# Altium PCB ESC_PCB.PcbDoc
Units mm, origin at the board's own origin, x right, y up, seen from the top; angles counter-clockwise.
Board outline 77.09 x 32.51 mm, 4 copper layers (Top signal, GND, VBAT, Bottom Signal), stack 0.603 mm thick; 61 components, 47 nets, 212 pads, 224 vias.
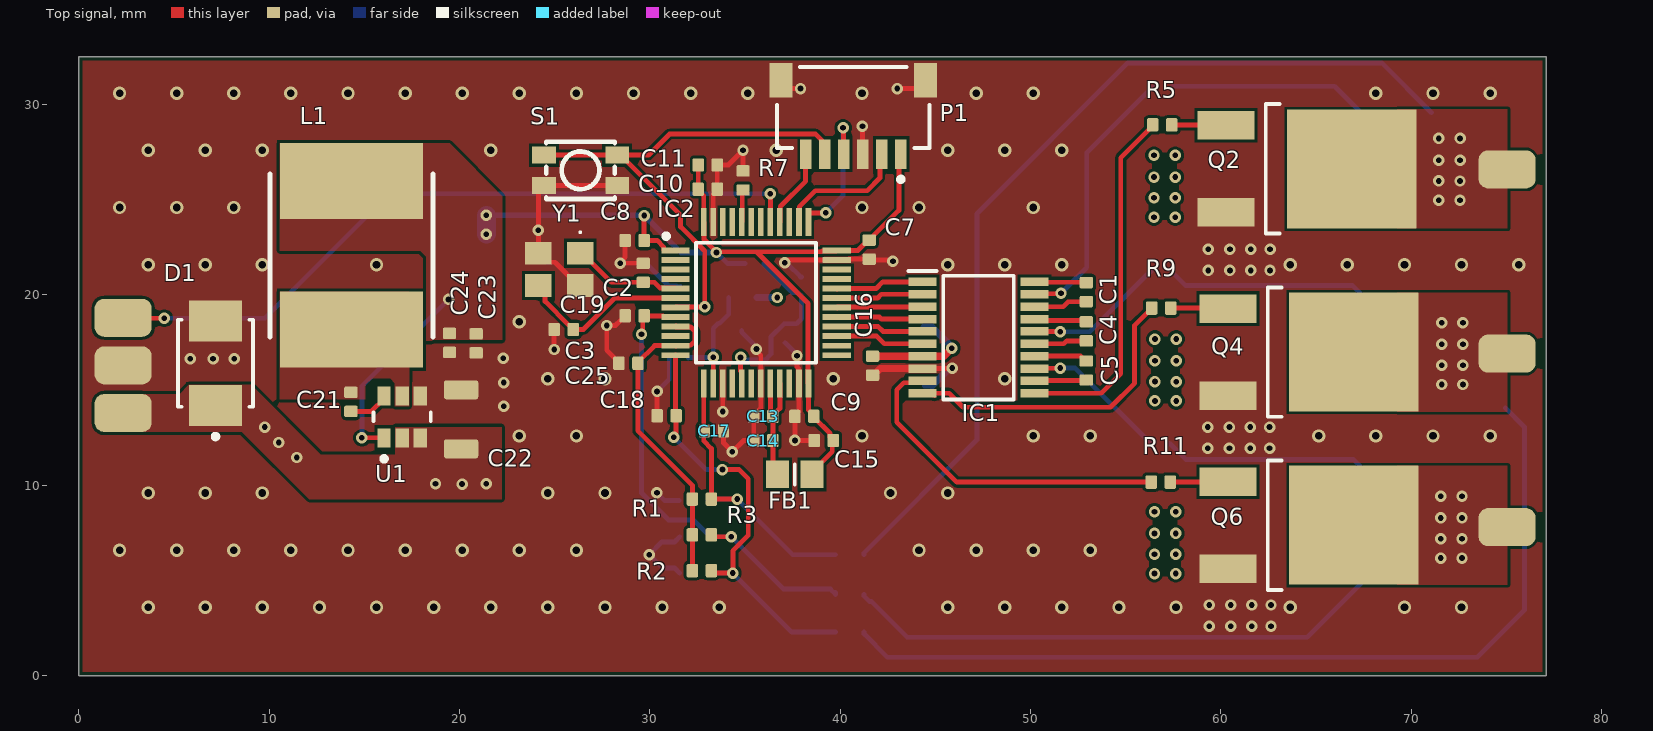
[diagram p0: Top signal view]
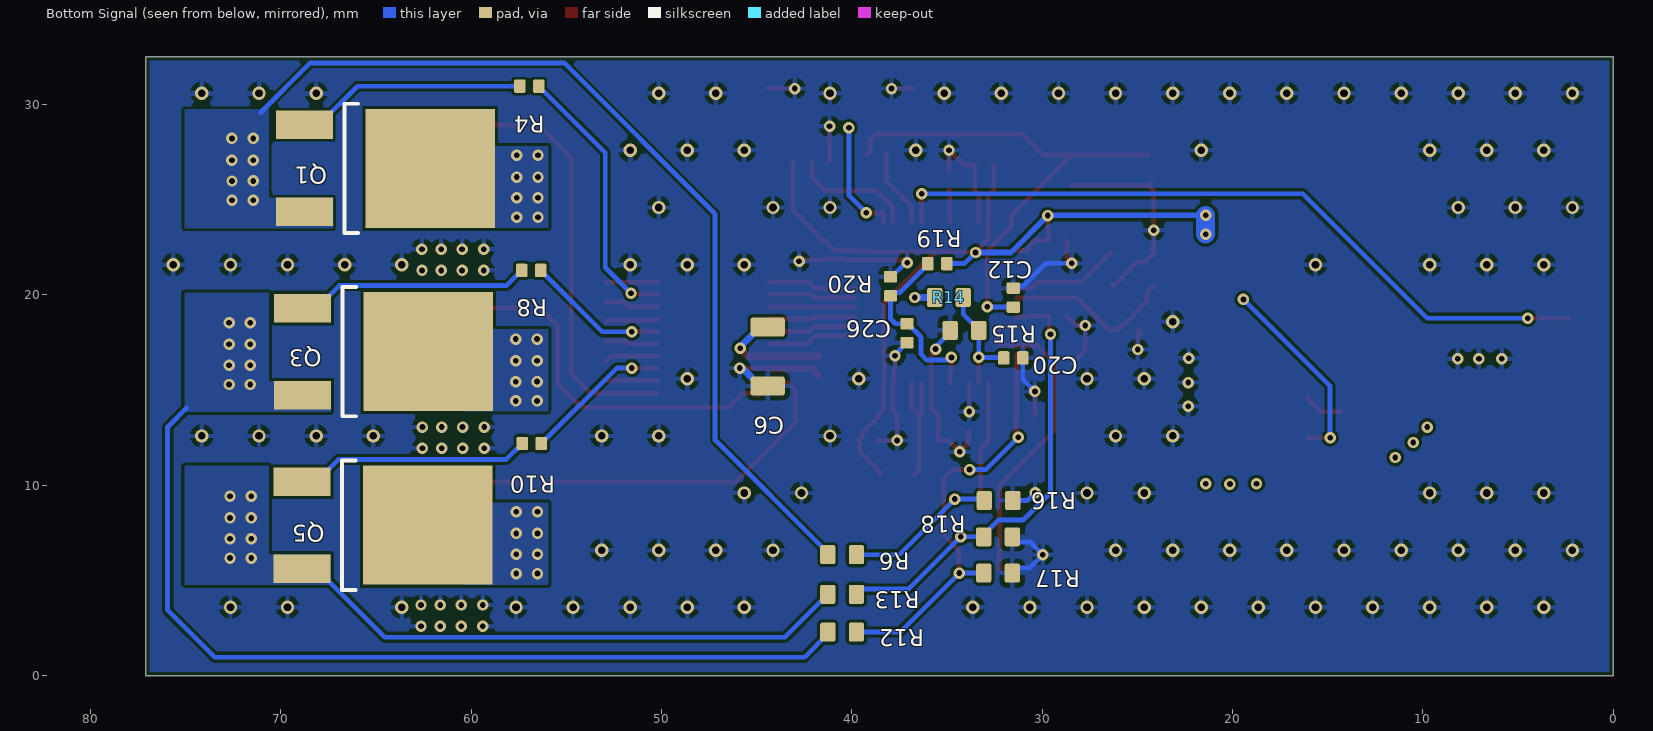
[diagram p1: Bottom Signal view, seen from below]
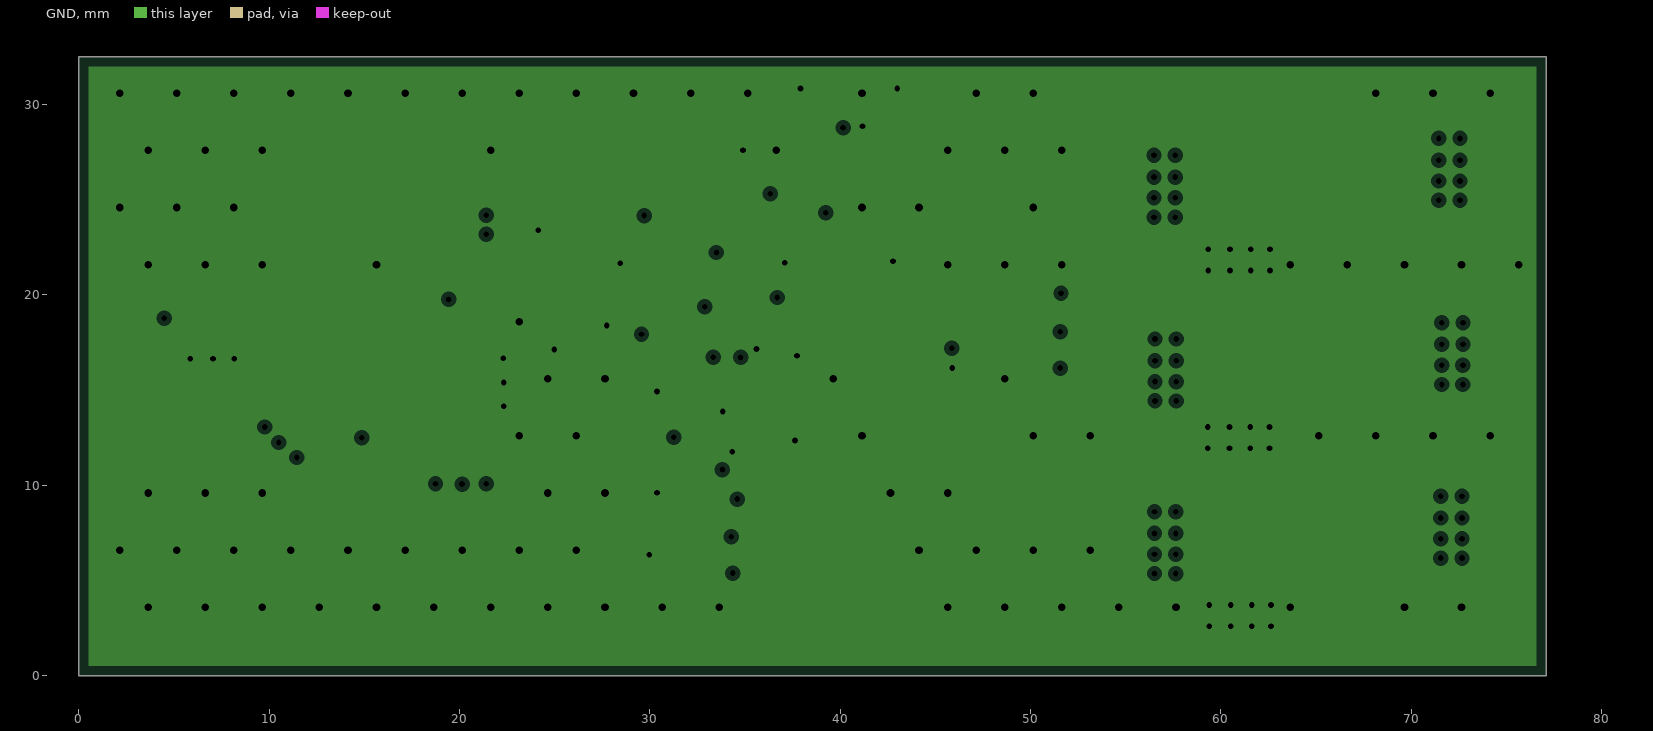
[diagram p2: GND, clearances drawn from the general rule]
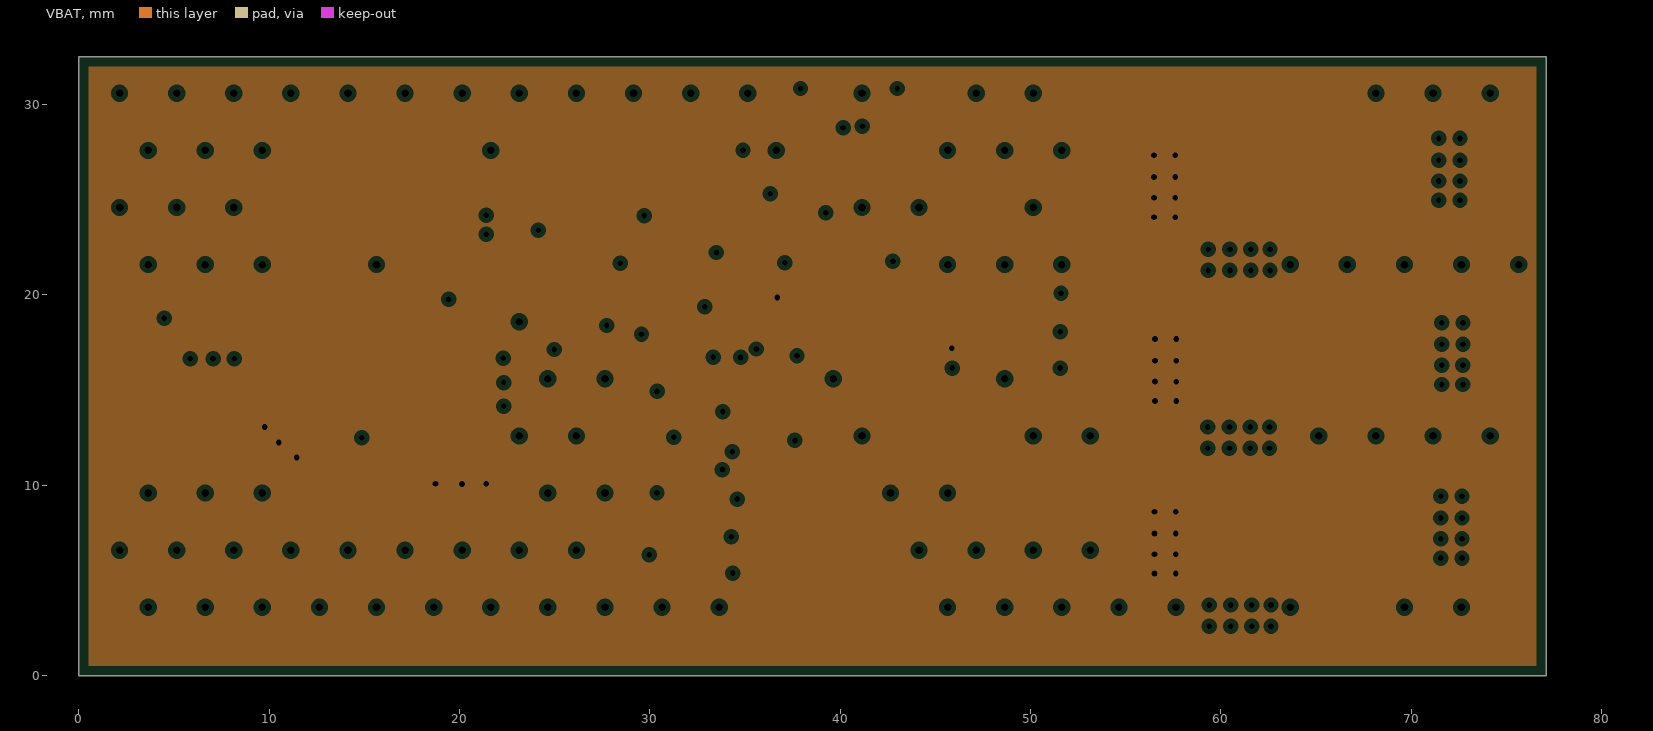
[diagram p3: VBAT, clearances drawn from the general rule]
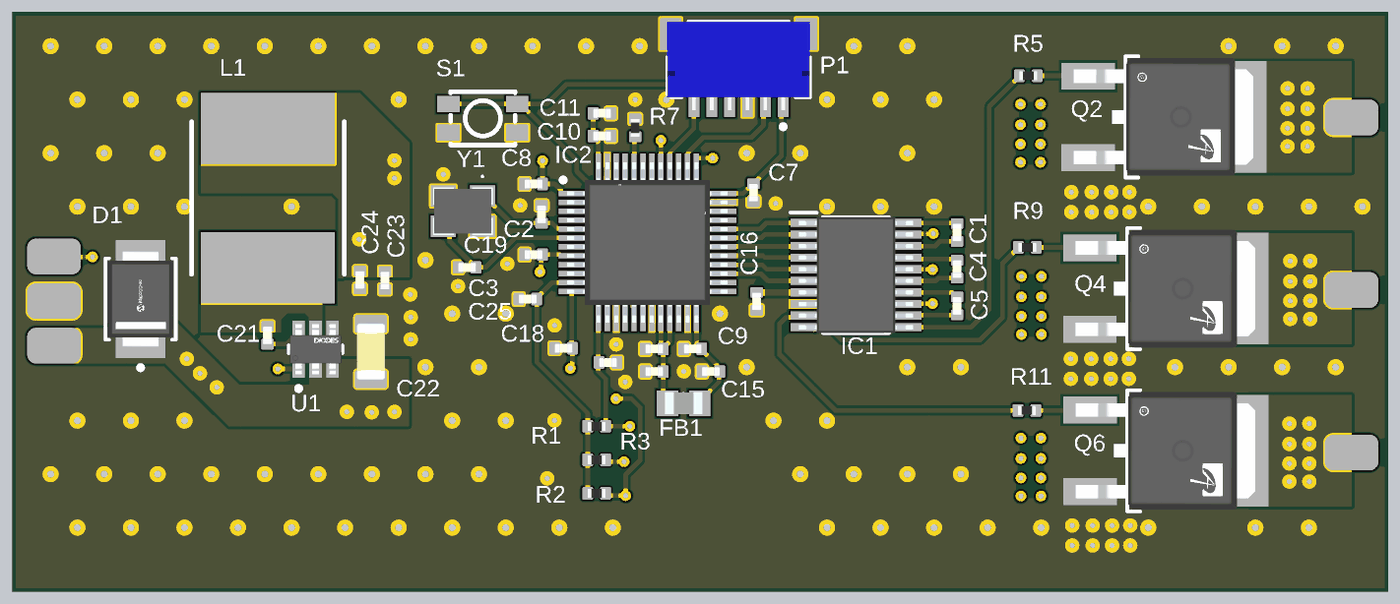
[diagram p4: 3D render of the assembled board from above, using the file's embedded part models]
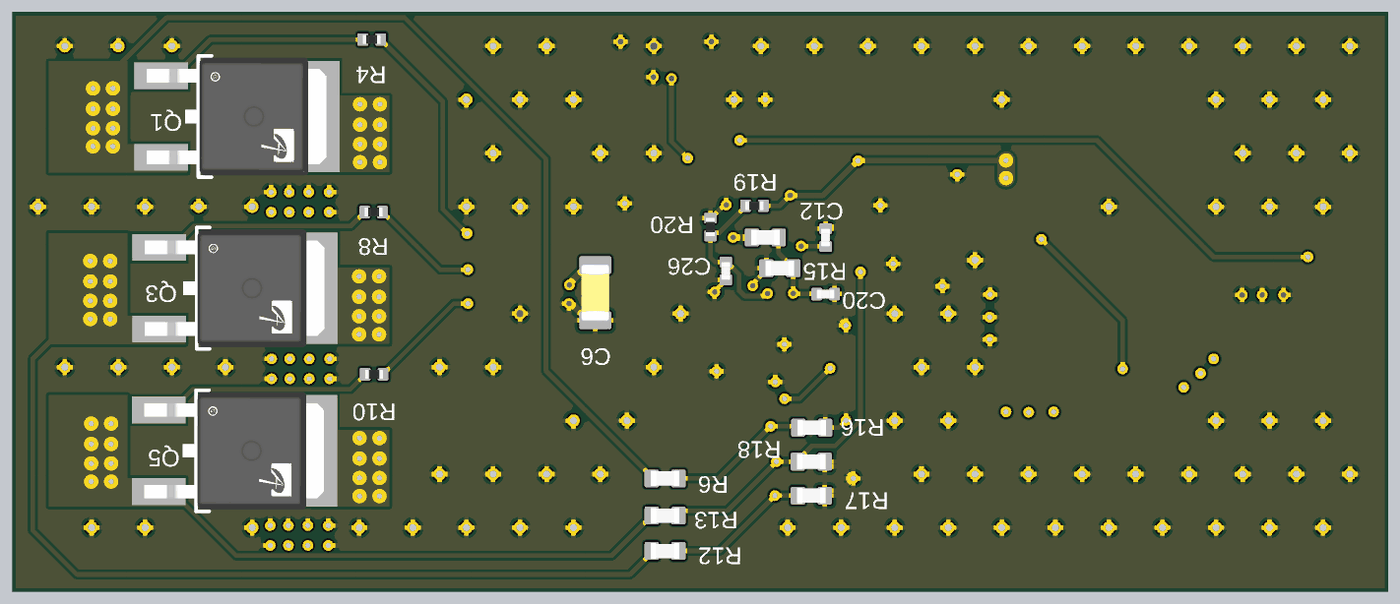
[diagram p5: 3D render of the assembled board from below, using the file's embedded part models]

## Layer stack, top to bottom
Top Solder: solder mask 0.0102, Solder Resist, Dk 3.5
Top signal: signal copper 0.035
Dielectric 2: prepreg 0.0711, PP-006, Dk 4.1
GND: plane copper 0.0356, net GND
Dielectric 1: dielectric 0.32, FR-4, Dk 4.8
VBAT: plane copper 0.0356, net VBAT
Dielectric 3: prepreg 0.0711, PP-006, Dk 4.1
Bottom Signal: signal copper 0.035
Bottom Solder: solder mask 0.0102, Solder Resist, Dk 3.5

## Board outline
0,0 0,32.512 77.089,32.512 77.089,0

## Design rules (kind name [scope] priority, off if disabled: settings)
BoardOutlineClearance [All] p1: gap=0.2 ignorepadtopadclearanceinfootprint=FALSE
Clearance [All] p1: gap=0.15 ignorepadtopadclearanceinfootprint=TRUE
Clearance Clearance_Layer [OnLayer('GND') Or OnLayer('5V')] p2: gap=0.254 ignorepadtopadclearanceinfootprint=TRUE
ComponentClearance [All] p1: gap=0.254 collisioncheckmode=3 verticalgap=2540 showdistances=FALSE
HoleSize [All] p1: absolutevalues=TRUE maxlimit=6.3 minlimit=0.15 maxpercent=80.000 minpercent=20.000
HoleToHoleClearance PAD-HoleToHoleClearance [IsPad] p1: gap=0.45 allowstackedmicrovias=FALSE
HoleToHoleClearance Via-HoleToHoleClearance [IsVia] p2: gap=0.2 allowstackedmicrovias=FALSE
MinimumAnnularRing [All] p1: minimumring=0.15
MinimumAnnularRing VIA-MinimumAnnularRing [IsVia] p2: minimumring=0.5
MinimumAnnularRing PAD-MinimumAnnularRing [IsPad] p3: minimumring=0.2
MinimumSolderMaskSliver [All] p1: minsoldermaskwidth=0.1
PlaneClearance [All] p1: clearance=0.254
PlaneConnect [All] p1: planeconnectstyle=Direct reliefexpansion=0.508 reliefentries=4 reliefconductorwidth=0.381 reliefairgap=0.254
PolygonConnect GND_ALL [All vs IsNamedPolygon('GND_ALL_BOT')  Or  IsNamedPolygon('GND_ALL_BOT')] p1: connectstyle=Relief reliefconductorwidth=0.254 reliefentries=4 polygonreliefangle="90 Angle" airgapwidth=0.254
PolygonConnect [All] p2: connectstyle=Direct reliefconductorwidth=0.381 reliefentries=4 polygonreliefangle="90 Angle" airgapwidth=0.254
RoutingCorners [All] p1: cornerstyle=45-Degree minsetback=0.381 maxsetback=0.381
RoutingVias [All] p1: holewidth=0.3 width=0.6 viastyle="Through Hole" minholewidth=0.2 minwidth=0.3 maxholewidth=6.3 maxwidth=6.5
SilkToSilkClearance [All] p1: silktosilkclearance=0.15
SilkToSolderMaskClearance [IsPad] p1: minsilkscreentomaskgap=0.1 clearancetoexposedcopper=TRUE
SolderMaskExpansion [All] p1: expansion=0.102 istentingtop=FALSE
SupplyNets "Schematic Supply Nets_3" [InNet('3V3')] p1: voltage=0.000
SupplyNets "Schematic Supply Nets_2" [InNet('3V3A')] p2: voltage=0.000
SupplyNets "Schematic Supply Nets_1" [InNet('VBAT')] p3: voltage=0.000
SupplyNets "Schematic Supply Nets" [InNet('GND')] p4: voltage=0.000
Width VBAT [InNet('VBAT')] p1: maxlimit=10 minlimit=0.254 preferedwidth=0.381 minimp=50.000000 maximp=50.000000 favimp=50.000000
Width [All] p2: maxlimit=10 minlimit=0.254 preferedwidth=0.254 toplayer_maxwidth=10 minimp=50.000000 maximp=50.000000 favimp=50.000000
21 further rules are at their usual default settings.

## Components (designator, comment, footprint, x,y, rotation, side; value= is the part's Value field where it differs from the comment)
C1 "100nF" CAP_0402 52.934,20.142 r90 top
C2 "12pF" CAP_0402 29.655,21.158 r90 top locked
C3 "12pF" CAP_0402 25.476,18.18 r180 top locked
C4 "100nF" CAP_0402 52.934,18.085 r90 top
C5 "100nF" CAP_0402 52.934,16.027 r90 top
C6 "10uF" CAP_1206 44.425,16.763 r90 bottom
C7 "100nF" CAP_0402 41.529,22.377 r270 top locked
C8 "100nF" CAP_0402 29.205,22.86 r180 top locked
C9 "100nF" CAP_0402 38.125,13.614 r180 top locked
C10 "100nF" CAP_0402 33.045,25.552 r0 top locked
C11 "4.7uF" CAP_0402 33.045,26.822 r0 top locked
C12 "100nF" CAP_0402 31.521,19.855 r90 bottom
C13 "100nF" CAP_0402 35.966,13.614 r180 top locked
C14 "1uF" CAP_0402 35.966,12.344 r0 top locked
C15 "100nF" CAP_0402 39.141,12.344 r180 top locked
C16 "100nF" CAP_0402 41.707,16.281 r90 top
C17 "1nF" CAP_0402 33.376,12.852 r180 top
C18 "1nF" CAP_0402 30.886,13.653 r0 top
C19 "1nF" CAP_0402 29.205,18.898 r0 top
C20 "1nF" CAP_0402 31.521,16.688 r180 bottom
C21 "100nF" CAP_0402 14.3,14.376 r270 top locked
C22 "10uF" CAP_1206 20.091,13.462 r270 top locked
C23 "22uF" CAP_0402 20.879,17.45 r90 top locked
C24 "22uF" CAP_0402 19.482,17.475 r90 top locked
C25 "1nF" CAP_0402 28.88,16.408 r0 top
C26 "100nF" CAP_0402 37.109,17.983 r90 bottom
D1 "SMBJ16A" FP-DO-214AA-MFG 7.188,16.408 r90 top
FB1 "MPZ2012S601ATD25" BEADC2112X105N 37.617,10.566 r0 top locked
IC1 "DRV8300DPWR" SOP65P640X120-20N 47.269,17.755 r0 top
IC2 "STM32G431CBT6" QFP50P900X900X160-48N 35.585,19.583 r0 top locked
L1 "4.7uH Inductor" "SMD 8x8 Inductor" 14.326,22.073 r90 top locked
P1 "SM06B-SRSS-TB(LF)(SN)" JST-SM06B-SRSS-TB_V 40.691,29.845 r180 top
Q1 "AOD4184A" FP-TO252-MFG 63.551,26.645 r270 bottom
Q2 "AOD4184A" FP-TO252-MFG 65.477,26.619 r270 top
Q3 "AOD4184A" FP-TO252-MFG 63.657,17.018 r270 bottom
Q4 "AOD4184A" FP-TO252-MFG 65.578,16.993 r270 top
Q5 "AOD4184A" FP-TO252-MFG 63.682,7.899 r270 bottom
Q6 "AOD4184A" FP-TO252-MFG 65.582,7.899 r270 top
R1 "10k" RES_0402 32.741,9.271 r0 top
R2 "10k" RES_0402 32.741,5.512 r0 top
R3 "10k" RES_0402 32.741,7.391 r0 top
R4 "10R" RES_0402 56.947,30.963 r0 bottom
R5 "10R" RES_0402 56.921,28.931 r0 top
R6 "100k" RES_0603 40.513,6.35 r0 bottom
R7 "10k" RES_0402 34.9,26.01 r90 top
R8 "10R" RES_0402 56.845,21.285 r0 bottom
R9 "10R" RES_0402 56.871,19.304 r0 top
R10 "10R" RES_0402 56.82,12.192 r0 bottom
R11 "10R" RES_0402 56.845,10.16 r0 top
R12 "100k" RES_0603 40.513,2.286 r0 bottom
R13 "100k" RES_0603 40.513,4.267 r0 bottom
R14 "100k" RES_0603 34.9,19.863 r0 bottom
R15 "10k" RES_0603 34.087,18.136 r180 bottom
R16 "18k" RES_0603 32.297,9.195 r0 bottom
R17 "18k" RES_0603 32.322,5.385 r0 bottom
R18 "18k" RES_0603 32.322,7.29 r0 bottom
R19 "10k" RES_0402 35.509,21.641 r180 bottom
R20 "10k" RES_0402 37.973,20.447 r270 bottom
S1 "C4B1802110" SW-SMD_4P-L3.5-W3.0-P1.50-LS4.7 26.365,26.543 r0 top
U1 "AP63203WU-7" FP-TSOT26-MFG 16.993,13.589 r90 top locked
Y1 "X32258MOB4SI" X32258MOB4SI 25.249,21.336 r180 top locked

## Footprints (in the part's own frame and the unit in brackets; to place one, negate y for a bottom-side part, rotate by r counter-clockwise, add the part's x,y. Pads: shape width x height; smd on the part's side, far side on the other; paste and mask are expansions set on the pad)
BEADC2112X105N [mm]
  rect 1.2x1.45 smd: 1(-0.9,0) 2(0.9,0)
  silkscreen extent 0,-0.53 0,0.53, body extent -1.05,-0.63 1.05,0.63, height 1.05
CAP_0402 [mm]
  rrect25% 0.6x0.7 smd: 1(-0.5,0) 2(0.5,0)
  body extent -0.5,-0.26 0.5,0.26, height 0.37
CAP_1206 [mm]
  rrect25% 1x1.8 smd: 1(-1.55,0) 2(1.55,0)
  body extent -1.6,-0.8 1.6,0.8, height 0.94
FP-DO-214AA-MFG [mm]
  rect 2.16x2.79 smd paste+0 mask+0: 1(-2.22,0) 2(2.22,0)
  silkscreen extent -3.97,-1.97 2.28,1.97, body extent -3.4,-2.07 3.4,2.07, height 0.25
FP-TO252-MFG [mm]
  rect 1.5x3 smd paste+0 mask+0: 1(-2.286,-5.202) 3(2.286,-5.202)
  rect 6.25x6.8 smd paste+0 mask+0: 4(0,1.398)
  silkscreen extent -3.4,-3.11 3.4,-2.38, body extent -3.3,-6.01 3.3,4.06, height 2.6
FP-TSOT26-MFG [mm]
  rect 1x0.7 smd paste+0 mask+0: 1(-1.099,0.95) 2(-1.099,0) 3(-1.099,-0.95) 4(1.099,-0.95) 5(1.099,0) 6(1.099,0.95)
  silkscreen extent -2.32,-1.5 0.22,1.5, body extent -1.7,-1.6 1.7,1.6, height 0.25
JST-SM06B-SRSS-TB_V [mm] "SMD, 6-Leads, Body 8x4.25mm, Pitch 1mm"
  rect 0.6x1.55 smd: 1(-2.5,2.45) 2(-1.5,2.45) 3(-0.5,2.45) 4(0.5,2.45) 5(1.5,2.45) 6(2.5,2.45)
  rect 1.2x1.8 smd: MP1(-3.8,-1.425) MP2(3.8,-1.425)
  silkscreen extent -4,-2.12 4,3.9, body extent -4,-2.12 4,2.83, height 2.96
QFP50P900X900X160-48N [mm]
  rect 1.475x0.3 smd: 1(-4.238,2.75) 2(-4.238,2.25) 3(-4.238,1.75) 4(-4.238,1.25) 5(-4.238,0.75) 6(-4.238,0.25) 7(-4.238,-0.25) 8(-4.238,-0.75) 9(-4.238,-1.25) 10(-4.238,-1.75) 11(-4.238,-2.25) 12(-4.238,-2.75) 25(4.238,-2.75) 26(4.238,-2.25) 27(4.238,-1.75) 28(4.238,-1.25) 29(4.238,-0.75) 30(4.238,-0.25) 31(4.238,0.25) 32(4.238,0.75) 33(4.238,1.25) 34(4.238,1.75) 35(4.238,2.25) 36(4.238,2.75)
  rect 0.3x1.475 smd: 13(-2.75,-4.238) 14(-2.25,-4.238) 15(-1.75,-4.238) 16(-1.25,-4.238) 17(-0.75,-4.238) 18(-0.25,-4.238) 19(0.25,-4.238) 20(0.75,-4.238) 21(1.25,-4.238) 22(1.75,-4.238) 23(2.25,-4.238) 24(2.75,-4.238) 37(2.75,4.238) 38(2.25,4.238) 39(1.75,4.238) 40(1.25,4.238) 41(0.75,4.238) 42(0.25,4.238) 43(-0.25,4.238) 44(-0.75,4.238) 45(-1.25,4.238) 46(-1.75,4.238) 47(-2.25,4.238) 48(-2.75,4.238)
  silkscreen extent -4.85,-3.15 3.15,3.62, body extent -4.5,-4.5 4.5,4.5, height 1.6
RES_0402 [mm]
  rrect25% 0.6x0.7 smd: 1(-0.5,0) 2(0.5,0)
  body extent -0.5,-0.25 0.5,0.25, height 0.3
RES_0603 [mm]
  rrect25% 0.8x1 smd: 1(-0.75,0) 2(0.75,0)
  body extent -0.8,-0.43 0.8,0.43, height 0.52
"SMD 8x8 Inductor" [mm] "SMD 8x8 Inductor"
  rect 4x7.5 smd: 1(-3.9,0) 2(3.9,0)
  silkscreen extent -4.28,-4.28 4.28,4.28
SOP65P640X120-20N [mm]
  rect 1.475x0.45 smd: 1(-2.938,2.925) 2(-2.938,2.275) 3(-2.938,1.625) 4(-2.938,0.975) 5(-2.938,0.325) 6(-2.938,-0.325) 7(-2.938,-0.975) 8(-2.938,-1.625) 9(-2.938,-2.275) 10(-2.938,-2.925) 11(2.938,-2.925) 12(2.938,-2.275) 13(2.938,-1.625) 14(2.938,-0.975) 15(2.938,-0.325) 16(2.938,0.325) 17(2.938,0.975) 18(2.938,1.625) 19(2.938,2.275) 20(2.938,2.925)
  silkscreen extent -3.67,-3.25 1.85,3.5, body extent -3.2,-3.25 3.2,3.25, height 1.2
SW-SMD_4P-L3.5-W3.0-P1.50-LS4.7 [mm]
  rect 1.25x0.9 smd: 1(-1.925,0.8) 2(1.925,0.8) 3(1.925,-0.8) 4(-1.925,-0.8)
  silkscreen extent -1.8,-1.5 1.8,1.5, body extent -2.22,-1.37 2.21,1.38, height 2.05
X32258MOB4SI [mm]
  rect 1.4x1.2 smd: 1(-1.1,-0.85) 2(1.1,-0.85) 3(1.1,0.85) 4(-1.1,0.85)
  silkscreen extent -1.15,-2 -1.05,-1.9, body extent -1.68,-1.33 1.68,1.33, height 0.9

## Part data
C1 C4 C5 C16 C21 C26: library part CAP_0402, "Capacitor SMD 0402", LCSC=C960916, Manufacturer="Samsung Electro-Mechanics", Manufacturer Part Number=CL05B104KB5NNNC, Rating="50V X7R"
C2 C3: library part CAP_0402, "Capacitor SMD 0402", LCSC=C26406, Manufacturer="Samsung Electro-Mechanics", Manufacturer Part Number=CL05C120JB5NNNC, Rating="50V C0G"
C6 C22: library part CAP_1206, "Capacitor SMD 1206", LCSC=C2803389, Manufacturer="Samsung Electro-Mechanics", Manufacturer Part Number=CL31Y106KBKVPNE, Rating=X7S
C7 C8 C9 C10 C12 C13 C15: library part CAP_0402, "Capacitor SMD 0402", LCSC=C100072, Manufacturer="Samsung Electro-Mechanics", Manufacturer Part Number=CL05A104KA5NNNC, Rating="25V X5R"
C11: library part CAP_0402, "Capacitor SMD 0402", LCSC=C368809, Manufacturer="Samsung Electro-Mechanics", Manufacturer Part Number=CL05A475KP5NRNC, Rating="10V X5R"
C14: library part CAP_0402, "Capacitor SMD 0402", LCSC=C52923, Manufacturer="Samsung Electro-Mechanics", Manufacturer Part Number=CL05A105KA5NQNC, Rating="25V X5R"
C17 C18 C19 C20: library part CAP_0402, "Capacitor SMD 0402", LCSC=C14442, Manufacturer="Samsung Electro-Mechanics", Manufacturer Part Number=CL05B102KB5NNNC, Rating="50V X7R"
C23 C24: library part CAP_0402, "Capacitor SMD 0402", LCSC=C2762594, Manufacturer="Samsung Electro-Mechanics", Manufacturer Part Number=CL10A226MO7JZNC, Rating="16V X5R"
C25: library part CAP_0402, "Capacitor SMD 0402", LCSC=C26409, Manufacturer="Samsung Electro-Mechanics", Manufacturer Part Number=CL05C101JB5NNNC, Rating="50V C0G"
D1: library part CMP-06396-000105-1, "TVS DIODE 16VWM 26VC SMBJ", LCSC=C353386, Manufacturer="Jingdao Microelectronics", Manufacturer Part Number=SMBJ16A, RoHS Compliant=Yes
FB1: library part GZ2012D601TF, "Ferrite Beads 600 @ 100MHz 0805", LCSC=C81034, Manufacturer=TDK, Manufacturer Part Number=MPZ2012S601ATD25
IC1: "Integrated Circuit", LCSC=C3036056, Manufacturer="Texas Instruments", Mouser Part Number=595-DRV8300DPWR, Arrow Part Number=DRV8300DPWR, Arrow Price/Stock=https://www.arrow.com/en/products/drv8300dpwr/texas-instruments?utm_currency=USD&region=nac, Datasheet Link=https://www.lcsc.com/datasheet/C3036056.pdf?spm=wm.sxq.inf.ggs___wm.fly.bg.0.stp&lcsc_vid=QARbBFEHQlJdVgUDE1RXVwJVT1cLBFdUTlQPUwFSQ1UxVlNeQ1NfX1JVQldXUDsOAxUeFF5JWBYZEEoKFBINSQcJGk4MFQUIE0wKAhAHHg1BVlRfWQkaCgg%3D, Height=1.2mm, Manufacturer Part Number=DRV8300DPWR, Mouser Price/Stock=https://www.mouser.co.uk/ProductDetail/Texas-Instruments/DRV8300DPWR?qs=eP2BKZSCXI6qJbKdYnGwBg%3D%3D
IC2: library part STM32G474CBT6, "Integrated Circuit", Arrow Part Number=STM32G431CBT6TR, LCSC=C529355, Manufacturer=STMicroelectronics, Mouser Part Number=511-STM32G431CBT6TR, Arrow Price/Stock=https://www.arrow.com/en/products/stm32g474cbt6tr/stmicroelectronics.html?utm_currency=USD&region=nac, Datasheet Link=https://www.st.com/resource/en/datasheet/stm32g474cb.pdf, Height=1.6mm, Manufacturer Part Number=STM32G431CBT6TR, Mouser Price/Stock=https://www.mouser.co.uk/ProductDetail/STMicroelectronics/STM32G474CBT6TR?qs=sPbYRqrBIVmx65Oml6enIQ%3D%3D
L1: library part SMNR8040-4R7MT, "5.9A 4.7uH 5.9A 24mΩ Magnetic Shielded Inductor ±20% SMD,8x8mm Fixed Inductors RoHS", LCSC=C266436, Manufacturer="Shun Xiang Nuo", Manufacturer Part Number=SMNR8040-4R7MT
P1: library part CMP-2000-07080-1, "Male Header, Pitch 1 mm, 1 x 6 Position, Height 2.95 mm, -25 to 85 degC, RoHS, Tape and Reel", LCSC=C160405, Manufacturer=JST, Package Description="Male Header, Pitch 1 mm, 1 X 6 Position, Height 2.9 mm", Package Reference=SM06B-SRSS-TB, Datasheet URL=https://datasheet.ciiva.com/26894/getdatasheetpartid-708885-26894671.pdf, Datasheet Version=11/2010, Manufacturer Part Number=SM06B-SRSS-TB(LF)(SN), Manufacturer URL=http://www.jst.com/home2.html, Mounting Technology=SurfaceMount, No of Positions=6, Pitch=1mm, Style/Orientation=RightAngleHeader/Plug, Termination=Solder, Type=ShroudedHeader
Q1 Q2 Q3 Q4 Q6: library part CMP-83955-000007-1, "MOSFET N-CH 40V 50A TO252", Case/Package=DPAK, Continuous Drain Current (ID)=50A, Drain to Source Voltage (Vdss)=40V, Gate to Source Voltage (Vgs)=20V, Input Capacitance=1.8nF, Max Operating Temperature=175°C, Max Power Dissipation=2.3W, Min Operating Temperature=-55°C, Power Dissipation=50W, Mount="Surface Mount", Number of Elements=1, Number of Pins=3, Packaging="Cut Tape", Radiation Hardening=No, Rds On Max=7mR
Q5: library part CMP-83955-000007-1, "MOSFET N-CH 40V 50A TO252", Case/Package=DPAK, Continuous Drain Current (ID)=50A, Drain to Source Voltage (Vdss)=40V, Gate to Source Voltage (Vgs)=20V, Input Capacitance=1.8nF, LCSC=C99124, Manufacturer=AOS, Max Operating Temperature=175°C, Max Power Dissipation=2.3W, Min Operating Temperature=-55°C, Power Dissipation=50W, Manufacturer Part Number=AOD4184A, Mount="Surface Mount", Number of Elements=1, Number of Pins=3, Packaging="Cut Tape", Rds On Max=7mR
R1 R2 R3 R7 R19 R20: library part RES_0402, "Resistor SMD 0402", LCSC=C2906861, Manufacturer=FOJAN, Manufacturer Part Number=FRC0402F1002TS
R4 R5 R8 R9 R10 R11: library part RES_0402, "Resistor SMD 0402", LCSC=C2906862, Manufacturer=FOJAN, Manufacturer Part Number=FRC0402F10R0TS
R6 R12 R13 R14: library part RES_0603, "Resistor SMD 0603", LCSC=C2907088, Manufacturer=FOJAN, Manufacturer Part Number="FRC0603J104 TS"
R15: library part RES_0603, "Resistor SMD 0603", LCSC=C2906982, Manufacturer=FOJAN, Manufacturer Part Number=FRC0603F1002TS
R16 R17 R18: library part RES_0603, "Resistor SMD 0603", LCSC=C2907001, Manufacturer=FOJAN, Manufacturer Part Number=FRC0603F1802TS
S1: "SMD NO Push Button Switch", LCSC=C49393608, Manufacturer=SAMZO, Manufacturer Part Number=C4B1802110
U1: library part CMP-12757-000006-1, "IC REG BUCK 3.3V 2A TSOT26", Ambient Temperature Range High=+85°C, Ambient Temperature Range Low=-40°C, LCSC=C780769, Manufacturer="Diodes Inc.", Max Junction Temp=+160°C, Max Supply Voltage=32V, Min Supply Voltage=3.8V, Nominal Supply Current=22uA, Output Current=2A, Output Voltage=3.3V, Package=TSOT26, Switching Frequency=1.1MHz, Temperature="to +160°C", Automotive=No, Category=IC, ComponentLink2Description=Datasheet, ComponentLink2URL=https://www.diodes.com/assets/Datasheets/AP63200-AP63201-AP63203-AP63205.pdf, Device Class L1="Integrated Circuits (ICs)", Device Class L2="Power Management ICs", Device Class L3="Voltage Regulators - Switching", Digikey Description="IC REG BUCK 3.3V 2A TSOT26", Footprint Url=https://www.diodes.com/assets/Package-Files/TSOT26.pdf, Height=1mm, Lead Free=Yes, Manufacturer Part Number=AP63203WU-7, Mouser Description="AP63203 Series 3.3 V 2 A SMT Fixed Low IQ Synchronous Buck - TSOT-26", Number Of Outputs=1, Octopart=https://octopart.com/ap63203wu-7-diodes+inc.-98099550, Output Type=Fixed, RoHS=TRUE, Standoff Height=0.01mm, Switching Topology=Buck, Temperature Range High=+160°C
Y1: "Crystal or Oscillator", LCSC=C2682775, Manufacturer=YXC, ComponentLink1Description="New link", Datasheet Link=https://item.szlcsc.com/datasheet/X32258MOB4SI/2777872.html, Height=0.8mm, Manufacturer Part Number=X32258MOB4SI

## Free pads (board coordinates)
  rrect50% 3x2 smd: 2(2.337,13.795) 2(2.337,16.295) 2(2.337,18.795) 3(75.039,7.798) 3(75.039,16.916) 3(75.039,26.589)

## Via types
v1: diameter 0.6, hole 0.3, Top signal to Bottom Signal, 127 vias
v2: diameter 0.7, hole 0.4, Top signal to Bottom Signal, 97 vias

## Nets (pads, with @x,y where several pads share a name; then routed paths per layer and width w, separated by ;. In a path a pad name is that pad's centre, name@x,y a point inside that pad or via, vN(x,y) a via of type N, cw(c..) or ccw(c..) an arc to the next point about the centre after c; other vN are vias at no path point)
3V3: C7.1 C8.1 C9.1 C10.1 C11.1 C15.1 C23.2 C24.2 FB1.2 IC2.1 IC2.24 IC2.36 IC2.48 L1.2 P1.1 R19.2 U1.1 | length 61.1
  Top signal w0.254: v1(14.877,12.489) U1.1 ; v1(29.709,24.164) 29.707,24.162 29.707,22.862 C8.1 30.386,22.86 30.737,22.509 30.737,22.356 30.76,22.333 IC2.1 ; C11.1 C10.1 32.545,25.502 32.835,25.212 IC2.48 32.858,23.798 32.858,22.907 33.503,22.263 v1(33.503,22.225) 33.538,22.26 39.024,22.26 39.074,22.31 39.8,22.31 IC2.36 40.942,22.333 41.306,22.697 41.306,22.704 41.479,22.877 C7.1 41.579,22.877 41.752,23.05 41.752,23.1 43.089,24.438 P1.1@43.089,26.963 ; 35.636,22.225 38.312,19.549 38.312,15.368 IC2.24 38.335,13.954 38.625,13.664 C9.1 38.625,13.564 39.468,12.721 39.468,12.517 C15.1 ; FB1.2 38.517,10.691 39.588,11.762 39.588,12.291 C15.1 ; C15.1@39.683,12.387 C15.1
  Bottom Signal w0.254: v1(14.877,12.489) 14.877,15.207 v1(19.431,19.761) ; v1(33.503,22.225) 34.087,21.641 R19.2
  Bottom Signal w0.3: v1(21.412,24.181) 29.693,24.181 31.648,22.225 v1(33.503,22.225)
  Bottom Signal w1: v1(21.412,23.19) v1(21.412,24.181)
3V3A: C13.1 C14.2 FB1.1 IC2.20 IC2.21 | length 6.8
  Top signal w0.254: IC2.20 36.335,13.745 C13.1 C14.2 36.466,10.817 FB1.1 ; C13.1@36.466,13.664 36.835,14.033 IC2.21
BEMF_A: C17.2 IC2.13 R1.2 R6.1 R16.2 | length 15.4
  Top signal w0.254: IC2.13 32.835,12.329 33.241,11.923 R1.2 v1(34.595,9.271)
  Bottom Signal w0.254: R16.2 33.123,9.271 v1(34.595,9.271) ; v1@34.671,9.195 37.516,6.35 R6.1
BEMF_B: C18.2 IC2.12 R2.2 R12.1 R17.2 | length 23.6
  Top signal w0.254: v1(31.267,12.522) 31.267,12.616 31.373,12.721 C18.2@31.373,13.653 ; C18.2@31.347,13.653 IC2.12 ; R2.2 33.368,5.385 v1(34.366,5.385) 34.366,6.56 35.172,7.365 35.172,10.344 34.695,10.82 v1(33.818,10.82)
  Bottom Signal w0.254: v1(31.267,12.522) 32.969,10.82 v1(33.818,10.82) ; R17.2 v1(34.366,5.385) 37.465,2.286 R12.1
BEMF_C: C19.2 IC2.8 R3.2 R13.1 R18.2 | length 24.7
  Top signal w0.254: v1(29.566,17.932) 29.632,17.999 29.632,18.825 C19.2 30.696,18.898 30.76,18.833 IC2.8 ; R3.2 33.342,7.29 v1(34.28,7.29)
  Bottom Signal w0.254: v1(29.566,17.932) 29.566,9.598 30.985,8.179 32.283,8.179 33.072,7.39 R18.2 ; R18.2@33.098,7.264 R18.2 ; R13.1@39.763,4.367 R13.1 39.49,4.54 37.03,4.54 v1(34.28,7.29) R18.2
BOOT0: IC2.44 R7.1 | length 1.7
  Top signal w0.254: IC2.44 34.858,23.844 34.858,25.468 R7.1
BST: C21.2 U1.6 | length 2.2
  Top signal w0.254: C21.2 15.381,13.876 16.043,14.538 U1.6
BSTA: C1.2 IC1.20 | length 2.7
  Top signal w0.254: IC1.20 50.226,20.661 52.915,20.661 C1.2
BSTB: C4.2 IC1.17 | length 2.8
  Top signal w0.254: IC1.17 50.28,18.657 52.861,18.657 C4.2
BSTC: C5.2 IC1.14 | length 2.8
  Top signal w0.254: IC1.14 52.631,16.78 52.884,16.527 C5.2
DSHOT: IC2.41 pad.2@2.337,18.795 | length 38.2
  Top signal w0.254: pad.2@2.337,18.795 2.362,18.771 v1(4.496,18.771) ; IC2.41 v1(36.335,25.31)
  Bottom Signal w0.254: v1(4.496,18.771) 9.779,18.771 16.319,25.31 v1(36.335,25.31)
GHA: IC1.19 R4.1 | length 14.3
  Top signal w0.254: IC1.19 50.235,20.057 51.578,20.057 v1(51.605,20.084)
  Bottom Signal w0.254: v1(51.605,20.084) 52.959,21.438 52.959,27.475 R4.1
GHB: IC1.16 R8.1 | length 7.5
  Top signal w0.254: IC1.16 50.218,18.069 51.552,18.069 v1(51.562,18.059)
  Bottom Signal w0.254: v1(51.562,18.059) 53.119,18.059 56.122,21.062 56.172,21.062 56.345,21.235 R8.1
GHC: IC1.13 R10.1 | length 7.8
  Top signal w0.254: IC1.13 50.22,16.142 51.55,16.142 v1(51.562,16.154)
  Bottom Signal w0.254: v1(51.562,16.154) 52.357,16.154 56.097,12.415 56.147,12.415 56.32,12.242 R10.1
GLA: IC1.11 R5.1 | length 18.7
  Top signal w0.254: IC1.11 53.717,14.83 54.741,15.854 54.741,27.2 56.421,28.881 R5.1
GLB: IC1.10 R9.1 | length 16.5
  Top signal w0.254: IC1.10 IC1.10@44.844,14.83 ; IC1.10@44.942,14.697 44.942,14.732 IC1.10@44.844,14.83 ; R9.1 55.474,18.407 55.474,15.367 54.204,14.097 46.457,14.097 45.724,14.83 44.942,14.83 IC1.10@44.844,14.83
GLC: IC1.9 R11.1 | length 17.9
  Top signal w0.254: IC1.9 44.233,15.382 43.347,15.382 42.977,15.011 42.977,13.31 46.126,10.16 R11.1
GND: C2.2 C3.2 C6.1 C7.2 C8.2 C9.2 C10.2 C11.2 C12.2 C13.2 C14.1 C15.2 C16.1 C17.1 C18.1 C19.1 C20.2 C22.1 C23.1 C24.1 C25.1 C26.1 D1.2 IC1.8 IC2.15 IC2.19 IC2.23 IC2.35 IC2.47 P1.3 P1.MP1 P1.MP2 pad.2@2.337,16.295 Q2.3 Q4.3 Q6.3 R7.2 R15.1 R16.1 R17.1 R18.1 R20.1 S1.3 S1.4 U1.4 Y1.2 Y1.4 | length 71.1
  Top signal w0.254: S1.4@24.296,25.887 S1.4 ; C3.2@24.803,17.957 C3.2@24.976,18.13 ; C3.2 C3.2@24.976,18.13 ; v1@25.042,17.194 v1(24.976,17.128) C3.2@24.976,18.13 ; Y1.4 26.249,20.486 25.022,21.713 24.622,21.713 Y1.2 v1(24.149,23.4) 24.149,25.451 S1.4 ; C25.1 28.38,16.458 27.737,17.101 v1(27.737,18.39) 28.197,18.39 28.482,18.675 28.532,18.675 28.705,18.848 C19.1 ; S1.3@28.465,25.743 S1.3 S1.4 ; C8.2 28.705,21.98 28.456,21.731 v1(28.456,21.658) C2.2 ; v1(30.378,9.601) v1@30.445,9.667 ; C18.1 v1(30.386,14.927) ; IC2.47 33.335,25.292 33.545,25.502 C10.2 C11.2 34.132,26.822 v1(34.9,27.59) R7.2 ; v1(33.833,13.868) 33.834,13.87 IC2.15 IC2.15 ; C17.1 33.876,12.225 v1(34.341,11.76) 34.925,12.344 C14.1 C13.2 35.466,13.664 35.835,14.033 IC2.19 35.835,16.827 35.603,17.059 v1(35.603,17.153) ; P1.MP2@36.789,30.838 v1(37.918,30.838) ; v1(37.087,21.683) 37.237,21.833 40.411,21.833 40.455,21.877 C7.2 41.584,21.823 42.719,21.823 v1(42.774,21.768) ; v1(37.735,16.803) 37.744,16.795 37.744,16.216 37.812,16.148 37.812,15.368 IC2.23 37.835,13.874 37.625,13.664 C9.2 v1(37.625,12.352) 37.629,12.348 38.637,12.348 C15.2 ; v1(41.173,28.854) 41.182,28.846 P1.3@41.182,27.056 ; C16.1 C16.1@41.757,15.781 ; v1(43.005,30.838) P1.MP1@44.389,30.838 ; IC1.8 45.873,16.13 v1(45.898,16.154)
  Top signal w0.381: C16.1@41.757,15.781 42.105,16.13 IC1.8
  Bottom Signal w0.254: v1@28.414,21.616 v1(28.456,21.658) 29.802,21.658 30.995,20.465 31.411,20.465 C12.2 C12.2@31.608,20.441 ; v1(30.378,9.601) 30.785,9.195 R16.1 ; v1(30.386,14.927) 31.021,15.562 C20.2 ; R17.1 31.299,5.658 30.664,5.658 v1(29.972,6.35) 30.639,7.017 31.299,7.017 R18.1 ; R15.1 34.837,18.036 35.537,17.336 35.537,17.219 v1(35.603,17.153) ; v1(37.087,21.683) 37.154,21.617 37.253,21.617 37.923,20.947 R20.1 ; C26.1 37.762,16.83 v1(37.735,16.803) ; C6.1 C6.1@44.825,15.213 ; v1@45.699,16.088 45.832,16.088 v1(45.898,16.154)
  Bottom Signal w0.381: C6.1@44.825,15.213 v1@45.699,16.088
  other v1: 59.385,2.591 60.528,2.591 61.62,2.591 62.636,2.591 59.385,3.708 60.528,3.708 61.621,3.708 62.637,3.708 59.309,11.938 60.452,11.938 61.544,11.938 62.56,11.938 59.309,13.056 60.452,13.056 61.545,13.055 62.561,13.055 22.327,14.148 22.327,15.392 5.867,16.637 7.061,16.637 8.179,16.637 22.301,16.662 59.334,21.285 60.477,21.285 61.57,21.285 62.586,21.285 59.334,22.403 60.477,22.403 61.57,22.403 62.586,22.403
  other v2: 3.647,3.589 6.647,3.589 9.647,3.589 12.647,3.589 15.647,3.589 18.647,3.589 21.647,3.589 24.647,3.589 27.647,3.589 30.647,3.589 33.647,3.589 45.647,3.589 48.647,3.589 51.647,3.589 54.647,3.589 57.647,3.589 63.647,3.589 69.647,3.589 72.647,3.589 2.147,6.589 5.147,6.589 8.147,6.589 11.147,6.589 14.147,6.589 17.147,6.589 20.147,6.589 23.147,6.589 26.147,6.589 44.147,6.589 47.147,6.589 50.147,6.589 53.147,6.589 3.647,9.589 6.647,9.589 9.647,9.589 24.647,9.589 27.647,9.589 42.647,9.589 45.647,9.589 23.147,12.589 26.147,12.589 41.147,12.589 50.147,12.589 53.147,12.589 65.147,12.589 68.147,12.589 71.147,12.589 74.147,12.589 24.647,15.589 27.647,15.589 39.647,15.589 48.647,15.589 23.147,18.589 3.647,21.589 6.647,21.589 9.647,21.589 15.647,21.589 45.647,21.589 48.647,21.589 51.647,21.589 63.647,21.589 66.647,21.589 69.647,21.589 72.647,21.589 75.647,21.589 2.147,24.589 5.147,24.589 8.147,24.589 41.147,24.589 44.147,24.589 50.147,24.589 3.647,27.589 6.647,27.589 9.647,27.589 21.647,27.589 36.647,27.589 45.647,27.589 48.647,27.589 51.647,27.589 2.147,30.589 5.147,30.589 8.147,30.589 11.147,30.589 14.147,30.589 17.147,30.589 20.147,30.589 23.147,30.589 26.147,30.589 29.147,30.589 32.147,30.589 35.147,30.589 41.147,30.589 47.147,30.589 50.147,30.589 68.147,30.589 71.147,30.589 74.147,30.589
HSE_IN: C2.1 IC2.5 Y1.1 | length 5.8
  Top signal w0.254: Y1.1 26.449,22.186 27.976,20.658 C2.1 30.243,20.658 30.545,20.356 31.324,20.356 IC2.5
HSE_OUT: C3.1 IC2.6 Y1.3 | length 9.1
  Top signal w0.254: Y1.3 24.503,20.132 24.503,19.654 25.753,18.403 25.803,18.403 25.976,18.23 C3.1 26.511,18.18 28.165,19.833 IC2.6
NetQ1_1: Q1.1 R4.2 | length 12.1
  Bottom Signal w0.254: R4.2 65.971,30.963 68.003,28.931 Q1.1
NetQ2_1: Q2.1 R5.2 | length 2.9
  Top signal w0.254: R5.2 60.249,28.931 Q2.1
NetQ3_1: Q3.1 R8.2 | length 12.3
  Bottom Signal w0.254: R8.2 58.133,20.498 66.916,20.498 68.109,19.304 Q3.1
NetQ4_1: Q4.1 R9.2 | length 3
  Top signal w0.254: R9.2 60.35,19.304 Q4.1
NetQ5_1: Q5.1 R10.2 | length 12.4
  Bottom Signal w0.254: R10.2 58.158,11.354 66.966,11.354 68.135,10.185 Q5.1
NetQ6_1: Q6.1 R11.2 | length 3
  Top signal w0.254: R11.2 60.354,10.16 Q6.1
NRST: C12.1 IC2.7 P1.5 S1.1 S1.2 | length 28.7
  Top signal w0.254: S1.1 S1.2 S1.2@28.465,27.343 ; IC2.7 31.37,19.356 32.869,19.356 v1(32.893,19.38) 32.889,19.384 32.889,22.305 31.623,23.571 31.623,24.185 S1.2@28.465,27.343 ; P1.5 39.018,27.568 39.018,28.141 38.712,28.447 31.038,28.447 29.934,27.343 S1.2@28.465,27.343
  Bottom Signal w0.254: C12.1 31.534,19.367 32.88,19.367 v1(32.893,19.38)
NTC: C26.2 IC2.17 R19.1 R20.2 | length 10
  Top signal w0.254: v1(34.773,16.713) 34.773,15.996 34.835,15.933 IC2.17
  Bottom Signal w0.254: v1(34.773,16.713) 34.91,16.576 36.058,16.576 36.364,16.882 36.364,17.788 37.059,18.483 37.711,18.483 37.973,18.745 R20.2 37.8,20.12 37.48,20.12 36.009,21.591 R19.1
PHASE_A: pad.3@75.039,26.589 Q1.3 Q2.4 R6.2 | length 48.6
  Bottom Signal w0.254: R6.2 41.263,6.45 47.193,12.38 47.193,24.257 55.121,32.185 68.45,32.185 71.069,29.566
  other v1: 71.45,24.968 72.568,24.967 71.45,25.984 72.568,25.983 71.45,27.076 72.568,27.076 71.45,28.219 72.568,28.219
PHASE_B: pad.3@75.039,16.916 Q3.3 Q4.4 R12.2 | length 47.4
  Bottom Signal w0.254: R12.2 41.263,2.186 42.484,0.965 73.482,0.965 75.946,3.429 75.946,13.059 74.945,14.061
  other v1: 71.602,15.291 72.72,15.29 71.602,16.307 72.72,16.306 71.603,17.399 72.72,17.399 71.603,18.542 72.72,18.542
PHASE_C: pad.3@75.039,7.798 Q5.3 Q6.4 R13.2 | length 30.1
  Bottom Signal w0.254: R13.2 41.263,4.167 41.536,3.894 41.636,3.894 43.517,2.014 64.535,2.014 68.135,5.613 Q5.3
  other v1: 71.552,6.172 72.669,6.171 71.552,7.188 72.669,7.187 71.552,8.28 72.669,8.28 71.552,9.423 72.669,9.423
SHA: C1.1 IC1.18 | length 2.8
  Top signal w0.254: IC1.18 51.714,19.38 51.976,19.642 C1.1
SHB: C4.1 IC1.15 | length 2.8
  Top signal w0.254: IC1.15 51.748,17.43 51.903,17.585 C4.1
SHC: C5.1 IC1.12 | length 2.7
  Top signal w0.254: IC1.12 50.231,15.504 52.91,15.504 C5.1
SW: C21.1 L1.1 U1.5
SWCLK: IC2.38 P1.2 | length 6.5
  Top signal w0.254: IC2.38 37.858,23.844 37.858,24.624 38.704,25.469 41.421,25.469 42.089,26.138 P1.2@42.089,26.963
SWDIO: IC2.37 P1.4 | length 8
  Top signal w0.254: IC2.37 38.335,24.282 38.358,24.305 38.718,24.305 38.721,24.308 v1(39.243,24.308) ; P1.4@40.157,27.031 40.174,27.048 40.174,28.761 v1(40.157,28.778)
  Bottom Signal w0.254: v1(39.243,24.308) 40.157,25.222 v1(40.157,28.778)
SWO: IC2.40 P1.6 | length 4.1
  Top signal w0.254: IC2.40 36.858,23.844 36.858,24.641 38.191,25.973 P1.6
TIM1_CH1: IC1.3 IC2.30 | length 4.6
  Top signal w0.254: IC2.30@39.846,19.31 IC2.30 39.846,19.356 44.308,19.356 IC1.3
TIM1_CH1N: IC1.6 IC2.27 | length 4.7
  Top signal w0.254: IC2.27@39.846,17.81 IC2.27 41.925,17.833 42.328,17.43 IC1.6
TIM1_CH2: IC1.2 IC2.31 | length 4.6
  Top signal w0.254: IC2.31 41.968,19.833 42.164,20.03 IC1.2
TIM1_CH2N: IC1.5 IC2.28 | length 4.6
  Top signal w0.254: IC2.28 42,18.333 42.253,18.08 IC1.5
TIM1_CH3: IC1.1 IC2.32 | length 4.7
  Top signal w0.254: IC2.32@39.844,20.313 IC2.32 41.896,20.333 42.243,20.68 IC1.1
TIM1_CH3N: IC1.4 IC2.29 | length 4.6
  Top signal w0.254: IC2.29 42.071,18.833 42.175,18.73 IC1.4
V_NEUT: C25.2 IC2.9 IC2.11 R1.1 R2.1 R3.1 | length 17.3
  Top signal w0.254: IC2.11@31.37,17.31 IC2.11 ; IC2.9@31.37,18.356 IC2.9 31.37,18.31 32.15,18.31 32.362,18.098 32.362,17.569 32.15,17.356 31.37,17.356 IC2.11 ; R2.1 R3.1 32.241,10 29.38,12.86 C25.2 29.38,16.458 30.255,17.333 IC2.11
VBAT: C6.2 C16.2 C22.2 D1.1 IC1.7 pad.2@2.337,13.795 Q1.4 Q3.4 Q5.4 R14.2 U1.2 U1.3 | length 7.3
  Top signal w0.381: C16.2 41.708,16.781 IC1.7 ; IC1.7 IC1.7 ; v1(45.872,17.196) 45.457,16.781 IC1.7
  Bottom Signal w0.381: R14.2 v1(36.703,19.863) ; C6.2 44.825,18.313 45.83,17.308 45.83,17.238 v1(45.872,17.196)
  other v1: 56.515,5.359 57.632,5.359 56.515,6.375 57.632,6.375 56.515,7.468 57.633,7.468 56.515,8.611 57.633,8.611 20.142,10.058 18.745,10.084 21.412,10.084 11.455,11.455 10.516,12.243 9.779,13.056 56.54,14.427 57.658,14.426 56.54,15.443 57.658,15.442 56.54,16.535 57.658,16.535 56.54,17.678 57.658,17.678 56.489,24.079 57.607,24.078 56.489,25.095 57.607,25.094 56.49,26.187 57.607,26.187 56.49,27.33 57.607,27.33
VBAT_ADC: C20.1 IC2.14 R14.1 R15.2 | length 6.2
  Top signal w0.254: IC2.14 v1(33.335,16.728)
  Bottom Signal w0.254: C20.1 32.041,16.708 33.315,16.708 v1(33.335,16.728) ; v1(33.335,16.728) R15.2@33.336,18.135 ; R15.2 33.337,18.236 33.61,18.509 33.676,18.509 34.15,18.982 R14.1
pads on no net: IC2.2 IC2.3 IC2.4 IC2.10 IC2.16 IC2.18 IC2.22 IC2.25 IC2.26 IC2.33 IC2.34 IC2.39 IC2.42 IC2.43 IC2.45 IC2.46

## Polygon pours and split planes (outlines as drawn)
GND on Top signal "GND_ALL_TOP" (solid, remove dead copper, pour order 31): 0,32.512 77.089,32.512 77.089,0 0,0
GND on Top signal "GND_L01_P027" (solid, remove dead copper, pour order 27): 58.826,15.519 61.925,15.519 61.925,13.386 63.17,13.386 63.17,11.481 58.826,11.481
GND on Top signal "GND_L01_P028" (solid, remove dead copper, pour order 28): 58.826,6.426 61.925,6.426 61.925,4.14 63.144,4.14 63.144,2.057 58.826,2.057
GND on Top signal "GND_L01_P026" (solid, remove dead copper, pour order 26): 58.725,25.146 61.824,25.146 61.824,22.86 63.043,22.86 63.043,20.777 58.725,20.777
PHASE_B on Top signal "PHASE_B_L01_P017" (solid, remove dead copper, pour order 17): 69.266,20.117 75.057,20.117 75.057,13.868 69.266,13.868
PHASE_C on Top signal "PHASE_C_L01_P018" (solid, remove dead copper, pour order 18): 69.266,11.024 75.057,11.024 75.057,4.775 69.266,4.775
PHASE_A on Top signal "PHASE_A_L01_P016" (solid, remove dead copper, pour order 16): 69.266,29.743 75.057,29.743 75.057,23.495 69.266,23.495
VBAT on Top signal "VBAT_L01_P015" (solid, remove dead copper, pour order 15): 3.15,14.783 5.309,14.783 5.791,15.265 9.068,15.265 12.725,11.608 16.916,11.608 16.916,9.271 12.116,9.271 8.56,12.802 8.534,12.802 3.15,12.802
GND on Top signal "GND_L01_P014" (solid, remove dead copper, pour order 14): 3.124,17.297 3.124,15.291 5.194,15.977 8.534,15.977 9.347,16.789 9.347,20.091 5.283,20.091 5.105,19.914 5.105,17.475 4.928,17.297
GND on Top signal "GND_L01_P012" (solid, remove dead copper, pour order 12): 23.114,13.335 23.114,17.374 18.694,17.374 18.694,15.875 18.415,15.596 17.729,15.596 17.501,15.367 17.501,13.97 17.501,13.691 17.856,13.335
VBAT on Top signal "VBAT_L01_P011" (solid, remove dead copper, pour order 11): 22.225,13.056 16.637,13.056 16.637,9.271 22.225,9.271
3V3 on Top signal "3V3_L01_P013" (solid, remove dead copper, pour order 13): 19.482,27.965 22.25,25.171 22.25,24.79 22.25,17.577 18.263,17.577 18.263,21.996 17.932,22.327 10.566,22.327 10.566,27.965
SW on Top signal "SW_L01_P010" (solid, remove dead copper, pour order 10): 16.612,14.148 17.374,14.148 17.374,20.142 17.348,20.168 10.566,20.168 10.566,14.529 15.062,14.529 15.062,15.265 15.418,15.621 16.358,15.621 16.612,15.367
GND on Bottom Signal "GND_ALL_BOT" (solid, remove dead copper, pour order 32): 0,32.512 77.089,32.512 77.089,0 0,0
PHASE_C on Bottom Signal "PHASE_C_L04_P019" (solid, remove dead copper, pour order 19): 67.386,6.375 70.637,6.375 70.637,11.024 75.057,11.024 75.057,4.775 67.386,4.775
PHASE_A on Bottom Signal "PHASE_A_L04_P022" (solid, remove dead copper, pour order 22): 67.259,25.095 70.637,25.095 70.637,29.743 75.057,29.743 75.057,23.495 67.259,23.495
PHASE_B on Bottom Signal "PHASE_B_L04_P021" (solid, remove dead copper, pour order 21): 67.386,15.469 70.637,15.469 70.637,20.117 75.057,20.117 75.057,13.868 67.386,13.868
VBAT on Bottom Signal "VBAT_L04_P025" (solid, remove dead copper, pour order 25): 60.375,23.52 55.956,23.52 55.956,27.813 60.375,27.813
VBAT on Bottom Signal "VBAT_L04_P024" (solid, remove dead copper, pour order 24): 60.375,4.775 55.956,4.775 55.956,9.068 60.375,9.068
VBAT on Bottom Signal "VBAT_L04_P023" (solid, remove dead copper, pour order 23): 60.376,13.894 55.956,13.894 55.956,18.186 60.376,18.186
VBAT on VBAT (split plane): 76.579,0.51 0.51,0.51 0.51,32.002 76.579,32.002
GND on GND (split plane): 76.579,0.51 0.51,0.51 0.51,32.002 76.579,32.002

## Other copper
Bottom Signal:
  region: 55.143,4.572
  region: 55.143,4.572
  region: 55.143,4.572
  region: 55.143,4.572
  region: 55.143,4.572
  region: 55.143,4.572
  region: 55.143,4.572
  region: 55.143,4.572
  region: 55.143,4.572
  region: 55.143,4.572
  region: 55.143,4.572
  region: 55.143,4.572
  region: 55.143,4.572
  region: 55.143,4.572
  region: 55.143,4.572
  region: 55.143,4.572
  region: 80.62,27.483
  region: 80.62,27.483